# Altium PCB DE-180824.PcbDoc (part 1 of 2)
Units mil, origin at the board's own origin, x right, y up, seen from the top; angles counter-clockwise.
Board outline 4852.2 x 3356.49 mil, 3 copper layers (Top Layer, Mid-Layer 2, Bottom Layer); 131 components, 108 nets, 473 pads, 80 vias.
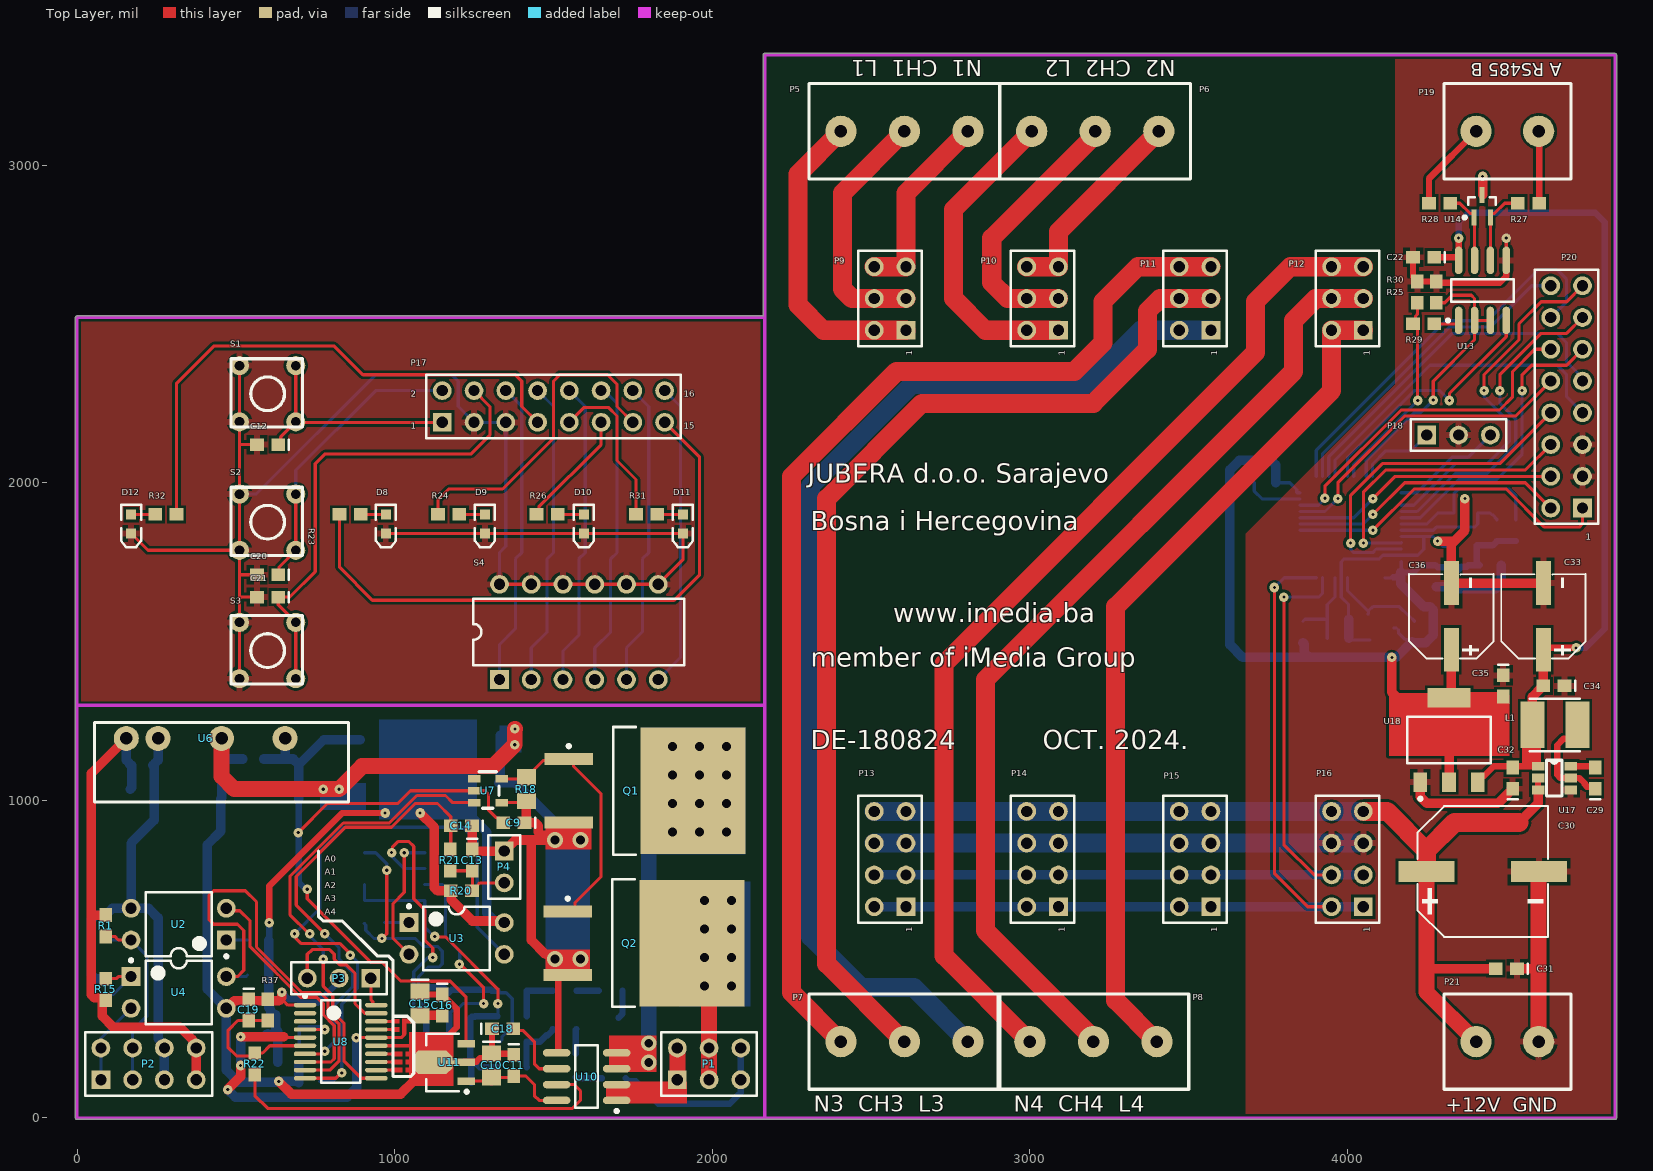
[diagram p0: Top Layer view]
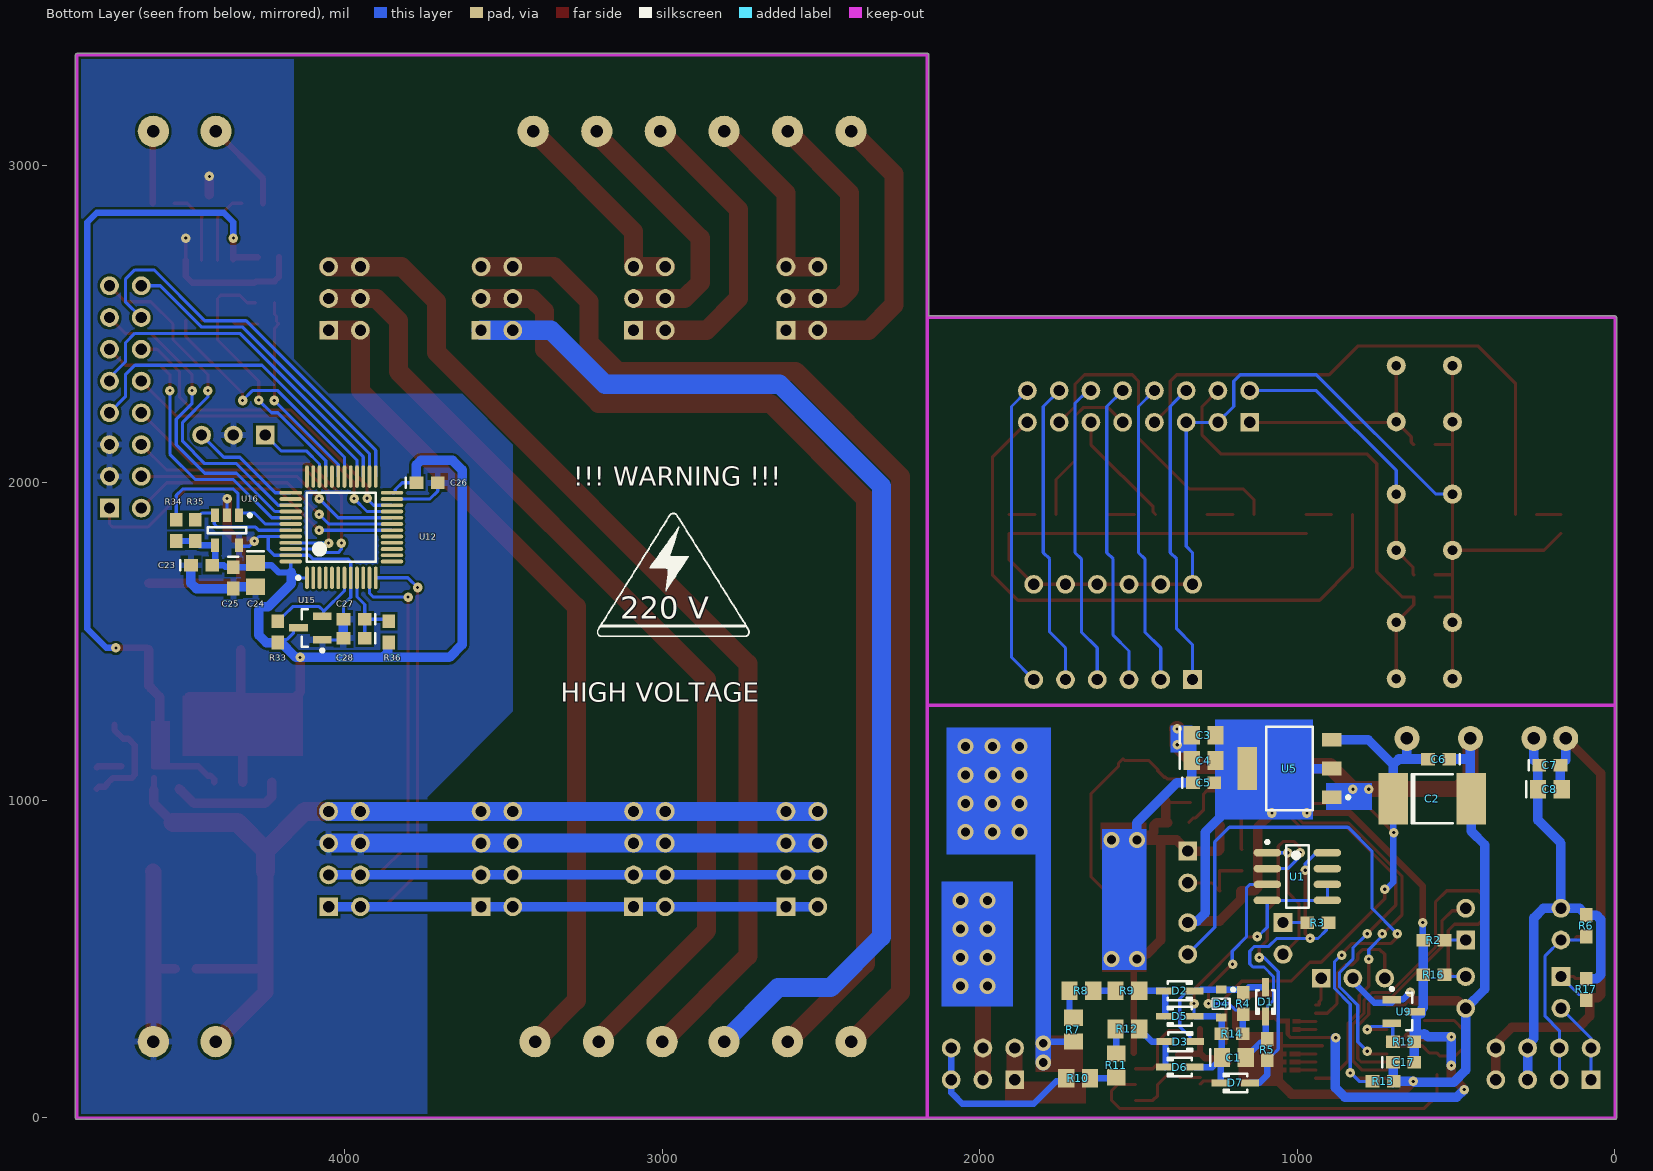
[diagram p1: Bottom Layer view, seen from below]
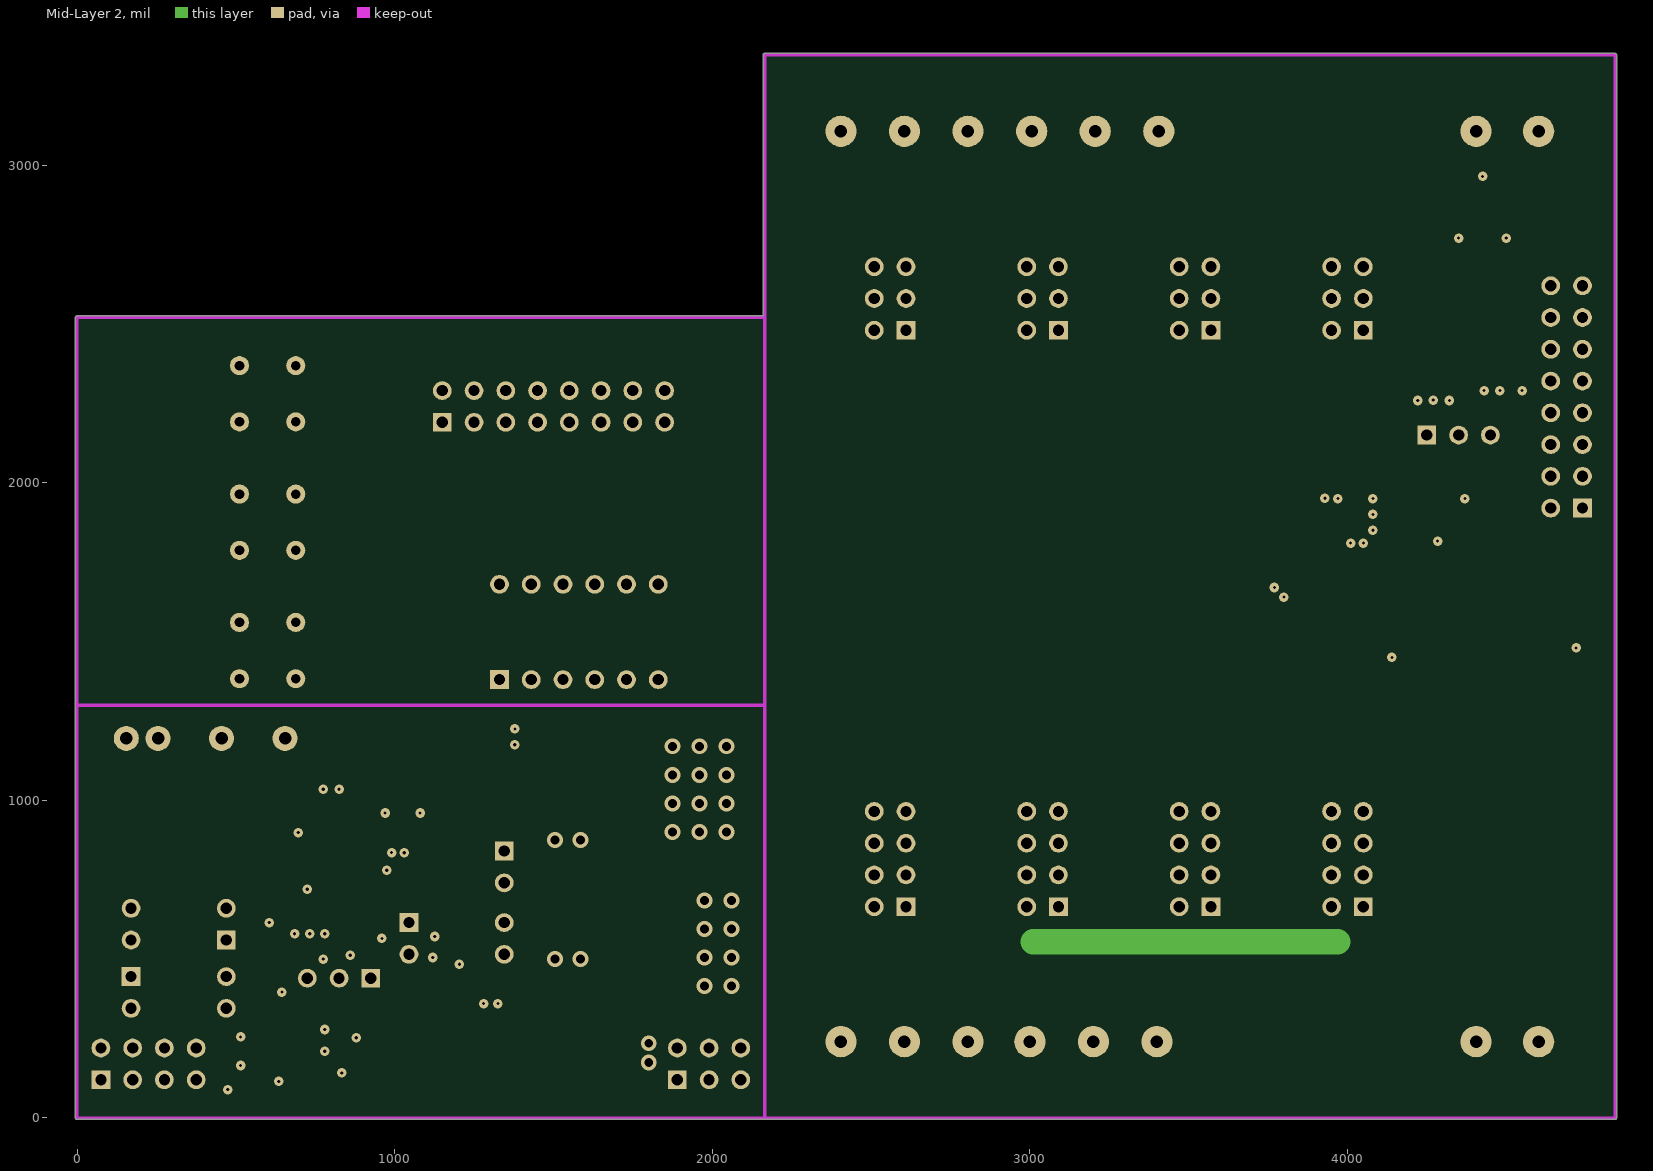
[diagram p2: Mid-Layer 2]

## Layer stack, top to bottom
Top Solder: solder mask 0.4, Solder Resist, Dk 3.5
Top Layer: signal copper 1.4
Dielectric 1: dielectric 12.6, FR-4, Dk 4.8
Mid-Layer 2: signal copper 1.4
Dielectric2: dielectric 12.6, FR-4, Dk 4.8
Bottom Layer: signal copper 1.4
Bottom Solder: solder mask 0.4, Solder Resist, Dk 3.5

## Board outline
-5.01,0 -5.01,2520 cw(c0,2520) 0,2525.01 2159.99,2525.01 2159.99,3346.46 cw(c2165,3346.46) 2165,3351.47 4842.17,3351.47 cw(c4842.17,3346.46) 4847.18,3346.46 4847.18,0 cw(c4842.17,0) 4842.17,-5.01 0,-5.01 cw(c0,0)

## Design rules (kind name [scope] priority, off if disabled: settings)
BoardOutlineClearance [All] p1: gap=11.81 ignorepadtopadclearanceinfootprint=FALSE except(15.75: Arc-SplitBarrior Arc-SplitContinuation Track-SplitBarrior Track-SplitContinuation SMDPad-SplitBarrior SMDPad-SplitContinuation THPad-SplitBarrior THPad-SplitContinuation Via-SplitBarrior Via-SplitContinuation Fill-SplitBarrior Fill-SplitContinuation Poly-SplitBarrior Poly-SplitContinuation Region-SplitBarrior Region-SplitContinuation Text-SplitBarrior Text-SplitContinuation)
Clearance "Clearance Different Nets" [All] p1: gap=7.87 ignorepadtopadclearanceinfootprint=FALSE except(3.5: Arc-Arc Arc-Track Arc-SMDPad Track-Track Track-SMDPad; 5: SMDPad-SMDPad SMDPad-Via THPad-Via Via-Via; 10: Arc-Via Arc-Text Track-Via Track-Text SMDPad-Text THPad-Text Via-Text Fill-Text Poly-Text Region-Text Text-Text; 19.68: THPad-THPad Via-Hole)
Clearance "Clearance Same Nets" [All] p2: gap=7.87 ignorepadtopadclearanceinfootprint=FALSE except(3.5: Arc-Arc Arc-Track Arc-SMDPad Track-Track Track-SMDPad SMDPad-SMDPad; 5: SMDPad-Via THPad-Via; 10: Arc-Via Arc-Text Track-Via Track-Text SMDPad-Text THPad-Text Via-Via Via-Text Fill-Text Poly-Text Region-Text Text-Text)
Clearance "Clearance Bottom Layer" [OnLayer('Bottom Layer')] p3: gap=8 ignorepadtopadclearanceinfootprint=TRUE except(10: Arc-Text Track-Text SMDPad-Text THPad-Text Via-Text Fill-Text Poly-Text Region-Text Text-Text)
Clearance "Clearance Top Layer" [OnLayer('Top Layer')] p4: gap=8 ignorepadtopadclearanceinfootprint=TRUE except(10: Arc-Text Track-Text SMDPad-Text THPad-Text Via-Text Fill-Text Poly-Text Region-Text Text-Text)
HoleSize [All] p1: absolutevalues=TRUE maxlimit=248.03 minlimit=7.87 maxpercent=80.000 minpercent=20.000
MinimumAnnularRing [All] p1: minimumring=5.12
MinimumSolderMaskSliver [All] p1: minsoldermaskwidth=3.94
PolygonConnect PolygonConnect_1 [All] p1: thpad.connectstyle=Relief thpad.reliefconductorwidth=20 thpad.reliefentries=4 thpad.polygonreliefangle="90 Angle" thpad.airgapwidth=10 smdpad.connectstyle=Relief smdpad.reliefconductorwidth=20 smdpad.reliefentries=4 smdpad.polygonreliefangle="90 Angle" smdpad.airgapwidth=10 via.connectstyle=Direct via.reliefconductorwidth=20 via.reliefentries=4 via.polygonreliefangle="90 Angle" via.airgapwidth=10
RoutingCorners [All] p1: cornerstyle=Round minsetback=100 maxsetback=100
RoutingVias [All] p1: holewidth=19.68 width=39.37 viastyle="Through Hole" minholewidth=7.87 minwidth=13.78 maxholewidth=39.37 maxwidth=78.74
SilkToSilkClearance [All] p1: silktosilkclearance=3.94
SilkToSolderMaskClearance [IsPad] p1: minsilkscreentomaskgap=3.94 clearancetoexposedcopper=TRUE
SolderMaskExpansion [All] p1: expansion=4 istentingtop=FALSE
SupplyNets "Schematic Supply Nets_10" [InNet('GND1')] p1: voltage=0.000
SupplyNets "Schematic Supply Nets_9" [InNet('3V3')] p2: voltage=0.000
SupplyNets "Schematic Supply Nets_8" [InNet('L1')] p3: voltage=0.000
SupplyNets "Schematic Supply Nets_7" [InNet('+12_1')] p4: voltage=0.000
SupplyNets "Schematic Supply Nets_6" [InNet('GND')] p5: voltage=0.000
SupplyNets "Schematic Supply Nets_5" [InNet('L1IN')] p6: voltage=0.000
SupplyNets "Schematic Supply Nets_4" [InNet('GND2')] p7: voltage=0.000
SupplyNets "Schematic Supply Nets_3" [InNet('5V')] p8: voltage=0.000
SupplyNets "Schematic Supply Nets_2" [InNet('+3V3_1')] p9: voltage=0.000
SupplyNets "Schematic Supply Nets_1" [InNet('+12V')] p10: voltage=0.000
SupplyNets "Schematic Supply Nets" [InNet('12V')] p11: voltage=0.000
Width [All] p1: maxlimit=100 minlimit=3.5 preferedwidth=15
25 further rules are at their usual default settings.

## Classes and differential pairs
component class DE-180824_1: C12 C20 C21 C22 C23 C24 C25 C26 C27 C28 C29 C30 C31 C32 C33 C34 C35 C36 D8 D9 D10 D11 D12 L1 P5 P6 P7 P8 P9 P10 P11 P12 P13 P14 P15 P16 P17 P18 P19 P20 P21 R23 R24 R25 R26 R27 R28 R29 R30 R31 R32 R33 R34 R35 R36 S1 S2 S3 S4 U12 U13 U14 U15 U16 U17 U18
component class DE-180824: C1 C2 C3 C4 C5 C6 C7 C8 C9 C10 C11 C13 C14 C15 C16 C17 C18 C19 D1 D2 D3 D4 D5 D6 D7 P1 P2 P3 P4 Q1 Q2 R1 R2 R3 R4 R5 R6 R7 R8 R9 R10 R11 R12 R13 R14 R15 R16 R17 R18 R19 R20 R21 R22 R37 U1 U2 U3 U4 U5 U6 U7 U8 U9 U10 U11

## Components (designator, comment, footprint, x,y, rotation, side; value= is the part's Value field where it differs from the comment)
C1 "" 0805 1200,190 r180 bottom value=10uF
C2 "47uF" H 575,1005 r180 bottom
C3 "C0805" 0805 1295,1205 r180 bottom value=10uF
C4 "C0805" 0805 1295,1125 r180 bottom value=10uF
C5 "C0603" 0603 1295,1055 r180 bottom value=100nF
C6 "C0603" 0603 555,1130 r0 bottom value=100nF
C7 "C0603" 0603 205,1110 r180 bottom value=100nF
C8 "C0805" 0805 205,1035 r180 bottom value=10uF
C9 "C0603" 0603 1375,930 r180 top value=100nF
C10 "" 0805 1305,165 r270 top value=4u7
C11 "" 0603 1375,165 r270 top value=100nF
C12 "C0603" 0603 600,2120 r180 top value=100nF
C13 "C0603" 0603 1245,811.54 r270 top value=100nF
C14 "C0603" 0603 1210,920 r180 top value=100nF
C15 "C0805" 0805 1080,360 r270 top value=10uF
C16 "C0603" 0603 1150,355 r270 top value=100nF
C17 "C0603" 0603 665,175 r180 bottom value=100nF
C18 "" 0603 1340,280 r0 top value=10nF
C19 "" 0603 540,340 r270 top value=100nF
C20 "C0603" 0603 600,1710 r180 top value=100nF
C21 "C0603" 0603 600,1640 r180 top value=100nF
C22 "100nF" 0603 4240,2710 r180 top
C23 "" 0603 4450,1740 r180 bottom value=100nF
C24 "4u7" 0805 4280,1710 r270 bottom
C25 "100nF" 0603 4350,1700 r270 bottom
C26 "100nF" 0603 3740,2000 r180 bottom
C27 "1uF" 0603 3970,1570 r0 bottom
C28 "10nF" 0603 3970,1510 r0 bottom
C29 "" 0603 4780,1070 r90 top value=100nF
C30 "470uF" "ROQANG VT1V471M1010" 4440,770 r0 top value=10uF
C31 "" 0603 4500,470 r180 top value=100nF
C32 "" 0603 4520,1070 r90 top value=100nF
C33 "470uF" "SMD,D6.3xL7.7mm Aluminum Electrolytic Capacitors" 4620,1590 r90 top
C34 "" 0603 4650,1360 r180 top value=100nF
C35 "" 0603 4490,1360 r270 top value=100nF
C36 "" "SMD,D6.3xL7.7mm Aluminum Electrolytic Capacitors" 4330,1590 r90 top value=220uF
D1 "1N4148" SOD323 1100,365 r270 bottom
D2 "1N4148" SOD323 1370,400 r180 bottom
D3 "1N4148" SOD323 1368.74,240 r180 bottom
D4 "Z12V" ONSC-SOD-323-2-477-02_V 1240,360 r270 bottom
D5 "1N4148" SOD323 1370,320 r0 bottom
D6 "1N4148" SOD323 1370,160 r0 bottom
D7 "1N4148" SOD323 1195,110 r0 bottom
D8 "CH 1" 1.6X0.8X0.8 972.13,1870 r270 top
D9 "CH 2" 1.6X0.8X0.8 1283.91,1870 r270 top
D10 "CH 3" 1.6X0.8X0.8 1595.7,1870 r270 top
D11 "CH 4" 1.6X0.8X0.8 1907.49,1870 r270 top
D12 "LEARN" 1.6X0.8X0.8 170,1870 r270 top
L1 "" XRNR4030-4.7uH/M 4650,1240 r0 top value=4,7uH
P1 "Header 3X2" HDR2X3 1890,120 r0 top
P2 "CTRL" HDR2X4 75,120 r0 top
P3 "Header 3" HDR1X3 925,440 r180 top
P4 "Header 2" HDR1X2 1345,840 r270 top
P5 "DIMMER1" "TERMINAL BLOK 3" 2605,3106.5 r90 top locked
P6 "DIMMER2" "TERMINAL BLOK 3" 3205.86,3106.5 r90 top locked
P7 "DIMMER3" "TERMINAL BLOK 3" 2605,240 r270 top locked
P8 "DIMMER4" "TERMINAL BLOK 3" 3200,240 r270 top locked
P9 "Header 3X2" HDR2X3 2610,2480 r90 top locked
P10 "Header 3X2" HDR2X3 3090,2480 r90 top locked
P11 "Header 3X2" HDR2X3 3570,2480 r90 top locked
P12 "Header 3X2" HDR2X3 4050,2480 r90 top locked
P13 "Header 4X2" HDR2X4 2610,665 r90 top locked
P14 "Header 4X2" HDR2X4 3090,665 r90 top locked
P15 "Header 4X2" HDR2X4 3570,665 r90 top locked
P16 "Header 4X2" HDR2X4 4050,665 r90 top locked
P17 "Header 8X2" HDR2X8 1150,2190 r0 top
P18 "ULINK ICSP" HDR1X3 4250,2150 r0 top
P19 "RS485" "TERMINAL BLOK 2" 4503.5,3106.5 r270 top
P20 "Header 8X2" HDR2X8 4740,1920 r90 top
P21 "POWER" "TERMINAL BLOK 2" 4503.5,240 r90 top locked
Q1 "16N65" INF-PG-TO263-3-2_N 1788.43,1030 r0 top
Q2 "16N65" INF-PG-TO263-3-2_N 1785.16,550 r0 top
R1 "" ERA-0603 90,605 r270 top value=2K2
R2 "10K" ERA-0603 570,560 r0 bottom value=330R
R3 "" ERA-0603 935,615 r180 bottom value=1K
R4 "3K9" ERA-0603 1170,360 r90 bottom
R5 "" ERA-0603 1095,215 r90 bottom value=39K
R6 "" ERA-0603 90,605 r90 bottom value=820R
R7 "" ERA-0805 1705,277.6 r90 bottom value=18K
R8 "" ERA-0805 1680,400 r180 bottom value=18K
R9 "" ERA-0805 1535,400 r180 bottom value=18K
R10 "" ERA-0805 1690,125 r180 bottom value=18K
R11 "" ERA-0805 1570,165 r90 bottom value=18K
R12 "" ERA-0805 1535,280 r180 bottom value=18K
R13 "" ERA-0603 730,115 r0 bottom value=2K2
R14 "39K" ERA-0603 1205,265 r180 bottom
R15 "" ERA-0603 90,405 r90 top value=1K2
R16 "10K" ERA-0603 570,450 r0 bottom value=1K
R17 "" ERA-0603 90,405 r90 bottom value=470R
R18 "100K" ERA-0805 1415,1035 r90 top
R19 "10K" ERA-0603 665,240 r180 bottom
R20 "10K" ERA-0603 1210,715 r180 top
R21 "1K" ERA-0603 1175,811.54 r270 top
R22 "" ERA-0603 560,170 r270 top value=1K
R23 "2K2" ERA-0603 860,1900 r0 top
R24 "2K2" ERA-0603 1170,1900 r0 top
R25 "10K" ERA-0603 4280,2600 r270 top
R26 "2K2" ERA-0603 1480,1900 r0 top
R27 "10R" ERA-0603 4570,2880 r180 top
R28 "10R" ERA-0603 4290,2880 r0 top
R29 "1K2" ERA-0603 4240,2500 r0 top
R30 "2K2" ERA-0603 4220,2600 r90 top
R31 "2K2" ERA-0603 1793.46,1900 r0 top
R32 "2K2" ERA-0603 280,1900 r180 top
R33 "10K" ERA-0603 4210,1530 r270 bottom
R34 "2K2" ERA-0603 4530,1850 r270 bottom
R35 "2K2" ERA-0603 4470,1850 r270 bottom
R36 "10R" ERA-0603 3860,1530 r270 bottom
R37 "" ERA-0603 600,340 r90 top value=2K
S1 "UP" TACTILE_SWITCH 600,2280 r180 top
S2 "<OK >" TACTILE_SWITCH 600,1875.71 r180 top
S3 "DOWN" TACTILE_SWITCH 600,1471.42 r180 top
S4 "SW DIP-6" DIP-12/SW 1580,1530 r0 top
U1 "LM393MX" M08A_N 1000,760 r180 bottom
U2 "PC817 DIP4" DIP-4 320,610 r180 top
U3 "PC817 DIP4" DIP-4 1195,565 r0 top
U4 "PC817 DIP4" DIP-4 320,395 r0 top
U5 "REG1117-3.3" ZZ311 1025,1100 r90 bottom
U6 "IF1212S-1W" IF1212S-1W 155,1195 r0 top
U7 "COS1415" SOT23-5 1356.3,1095 r180 top
U8 "STM32F030F4P6" STM-TSSOP20_N 830,240 r0 top
U9 "TLV803MDBZR" DBZ3_N 665,335 r180 bottom
U10 "MCS1802GS-10-Z" SOIC-SN8_N 1604.49,130 r180 top
U11 "L78L05ACUTR" SOT-89_N 1150,175 r180 top
U12 "STM32F030C8T6" STM-LQFP48_N 4010,1860 r90 bottom
U13 "SN75176BD" D008_N 4425,2605.51 r90 top
U14 "ESDS552" DCK3_N 4424.18,2870.53 r90 top
U15 "TLV803MDBZR" DBZ3_N 4107.4,1542.6 r0 bottom
U16 "24AA01T-I/OT" SOT-23-OT5_N 4370,1850 r270 bottom
U17 "AP63205" TSOT-26 4600,1107.4 r0 top
U18 "REG1117-3.3" ZZ311 4320,1190 r0 top

## Footprints (in the part's own frame and the unit in brackets; to place one, negate y for a bottom-side part, rotate by r counter-clockwise, add the part's x,y. Pads: shape width x height; smd on the part's side, far side on the other; paste and mask are expansions set on the pad)
1.6X0.8X0.8 [mm] "SM LED; 2 Flat Leads"
  rect 0.8x0.8 smd: 1(-0.75,0) 2(0.75,0)
  silkscreen extent -1.55,-0.8 1.85,0.8
0603 [mm] "Chip Capacitor; Body 1.6 x 0.8 mm (LxW typ)"
  rect 1.1x1 smd: 1(-0.85,0) 2(0.85,0)
  silkscreen extent -1.7,-0.4 -1.7,0.4
0805 [mm] "Chip Capacitor; Body 2.0 x 1.2 mm (LxW typ)"
  rect 1.3x1.5 smd: 1(-0.95,0) 2(0.95,0)
  silkscreen extent -1.9,-0.65 -1.9,0.65
D008_N [mm] "SOIC, 8-Leads, Body 4.9x3.9mm, Pitch 1.27mm, IPC Medium Density"
  oval 2.2x0.6 smd: 1(-2.4,1.905) 2(-2.4,0.635) 3(-2.4,-0.635) 4(-2.4,-1.905) 5(2.4,-1.905) 6(2.4,-0.635) 7(2.4,0.635) 8(2.4,1.905)
  silkscreen extent -2.52,-2.5 0.9,2.88, body extent -1.95,-2.45 1.95,2.45, height 1.75
DBZ3_N [mm] "SOT23, 3-Leads, Body 2.9x1.3mm, Pitch 0.95mm, Lead Span 2.4mm, IPC Medium Density"
  rect 1.5x0.6 smd: 1(-0.95,0.95) 2(-0.95,-0.95) 3(0.95,0)
  silkscreen extent -1.07,-1.5 0.7,1.92, body extent -0.7,-1.52 0.7,1.52, height 1.12
DCK3_N [mm] "SOT23, 3-Leads, Body 2.0x1.25mm, Pitch 0.65mm, Lead Span 2.1mm, IPC Medium Density"
  rect 1.3x0.4 smd: 1(-0.9,0.65) 2(-0.9,-0.65) 3(0.9,0)
  silkscreen extent -1.02,-1.1 0.7,1.52, body extent -0.7,-1.07 0.7,1.08, height 1.1
DIP-4 [mm] "DIP; 4 Leads; Row Spacing 7.62 mm; Pitch 2.54 mm"
  rect 1.5x1.5 hole 0.9: 1(-3.81,1.27)
  round 1.5 hole 0.9: 2(-3.81,-1.27) 3(3.81,-1.27) 4(3.81,1.27)
  silkscreen extent -3.94,-2.55 2.65,2.69, body extent -3.15,-2.5 3.15,2.5, height 5.6
DIP-12/SW [mm] "DIP Switch; 12 Leads"
  rect 1.5x1.5 hole 0.9: 1(-6.35,-3.81)
  round 1.5 hole 0.9: 2(-3.81,-3.81) 3(-1.27,-3.81) 4(1.27,-3.81) 5(3.81,-3.81) 6(6.35,-3.81) 7(6.35,3.81) 8(3.81,3.81) 9(1.27,3.81) 10(-1.27,3.81) 11(-3.81,3.81) 12(-6.35,3.81)
  silkscreen extent -8.43,-2.65 8.41,2.65
ERA-0603 [mm] "Chip Resistor; Body 1.6 x 0.8 mm (LxW typ)"
  rect 1.1x1 smd: 1(-0.85,0) 2(0.85,0)
ERA-0805 [mm] "Chip Resistor; Body 2 x 1.3 mm (LxW typ)"
  rect 1.3x1.5 smd: 1(-0.95,0) 2(0.95,0)
H [mm] "Chip Capacitor; Body 7.24 x 3.81 mm (LxW typ)"
  rect 2.35x4.1 smd: 1(-3.125,0) 2(3.125,0)
  silkscreen extent -1.65,-1.95 1.65,1.95
HDR1X2 [mm] "Connector; Header; 2 Position"
  rect 1.5x1.5 hole 0.9: 1(0,0)
  round 1.5 hole 0.9: 2(2.54,0)
  silkscreen extent -1.27,-1.27 3.81,1.27
HDR1X3 [mm] "Connector; Header; 3 Position"
  rect 1.5x1.5 hole 0.9: 1(0,0)
  round 1.5 hole 0.9: 2(2.54,0) 3(5.08,0)
  silkscreen extent -1.27,-1.27 6.35,1.27
HDR2X3 [mm] "Connector; Header; 3x2 Position"
  rect 1.5x1.5 hole 0.9: 1(0,0)
  round 1.5 hole 0.9: 2(0,2.54) 3(2.54,0) 4(2.54,2.54) 5(5.08,0) 6(5.08,2.54)
  silkscreen extent -1.27,-1.27 6.35,3.81
HDR2X4 [mm] "Connector; Header; 4x2 Position"
  rect 1.5x1.5 hole 0.9: 1(0,0)
  round 1.5 hole 0.9: 2(0,2.54) 3(2.54,0) 4(2.54,2.54) 5(5.08,0) 6(5.08,2.54) 7(7.62,0) 8(7.62,2.54)
  silkscreen extent -1.27,-1.27 8.89,3.81
HDR2X8 [mm] "Connector; Header; 8x2 Position"
  rect 1.5x1.5 hole 0.9: 1(0,0)
  round 1.5 hole 0.9: 2(0,2.54) 3(2.54,0) 4(2.54,2.54) 5(5.08,0) 6(5.08,2.54) 7(7.62,0) 8(7.62,2.54) 9(10.16,0) 10(10.16,2.54) 11(12.7,0) 12(12.7,2.54) 13(15.24,0) 14(15.24,2.54) 15(17.78,0) 16(17.78,2.54)
  silkscreen extent -1.27,-1.27 19.05,3.81
IF1212S-1W [mm] "Isolated DC/DC converter"
  round 2 hole 1: 1(0,0) 2(2.54,0) 4(7.62,0) 6(12.7,0)
  silkscreen extent -2.54,-5.08 17.78,1.27, body extent -2.54,-5.08 17.78,1.27, height 10
INF-PG-TO263-3-2_N [mm] "DPAK, 3-Leads, Body 10x9.25mm, Pitch 2.54mm, IPC Medium Density"
  rect 3.85x0.95 smd: 1(-6.1,2.54) 3(-6.1,-2.54)
  rect 8.4x10.1 smd: 2(3.85,0)
  silkscreen extent -6.22,-5.1 -0.75,5.1, body extent -2.55,-5.1 6.9,5.1, height 4.4
M08A_N [mm] "SOIC, 8-Leads, Body 4.9x3.9mm, Pitch 1.27mm, IPC Medium Density"
  oval 2.2x0.6 smd: 1(-2.4,1.905) 2(-2.4,0.635) 3(-2.4,-0.635) 4(-2.4,-1.905) 5(2.4,-1.905) 6(2.4,-0.635) 7(2.4,0.635) 8(2.4,1.905)
  silkscreen extent -2.53,-2.5 0.9,2.88, body extent -2,-2.5 2,2.5, height 1.75
ONSC-SOD-323-2-477-02_V [mm] "SOD, 2-Leads, Body 1.7x1.25mm"
  rect 0.63x0.83 smd: 1(-1.115,0) 2(1.115,0)
  silkscreen extent -1.24,-0.67 0.4,1.09, body extent -0.85,-0.63 0.85,0.63, height 1.06
"ROQANG VT1V471M1010" [mm] "470uF 35V 286mA@120Hz ±20% SMD,D10xL10.2mm Aluminum Electrolytic Capacitors - SMD ROHS"
  rect 4.5x1.65 smd: 1(-4.862,0.146) 2(4.138,0.146)
  silkscreen extent -5.59,-5.08 4.86,5.37, body extent -5,-5 5,5, height 10.2
"SMD,D6.3xL7.7mm Aluminum Electrolytic Capacitors" [mm]
  rect 3.5x1.2 smd paste+0 mask+0.051: 1(-2.949,0.074) 2(2.391,0.074)
  silkscreen extent -3.66,-3.3 3.1,3.45, body extent -3.4,-3.15 2.9,3.15, height 7.7
SOD323 [mm] "SOD-323/SC-76; 2 Leads; Body 1.7 x 1.3 mm, (LxW)"
  rect 1.45x0.55 smd: 1(1.175,0) 2(-1.175,0)
  silkscreen extent -0.95,-0.75 0.95,0.75
SOIC-SN8_N [mm] "SOIC, 8-Leads, Body 4.9x3.8mm, Pitch 1.27mm, IPC Medium Density"
  oval 2.2x0.6 smd: 1(-2.4,1.905) 2(-2.4,0.635) 3(-2.4,-0.635) 4(-2.4,-1.905) 5(2.4,-1.905) 6(2.4,-0.635) 7(2.4,0.635) 8(2.4,1.905)
  silkscreen extent -2.53,-2.5 0.9,2.88, body extent -2,-2.5 2,2.5, height 1.75
SOT23-5 [mm] "SMD small outline"
  rect 1x0.6 smd paste+0 mask+0.05: 1(2.7,0.701) 2(2.7,1.651) 3(2.7,2.601) 4(0.5,2.601) 5(0.5,0.701)
  silkscreen extent 0.71,0.13 2.3,3.05
SOT-23-OT5_N [mm] "SOT23, 5-Leads, Body 2.9x1.6mm, Pitch 0.95mm, Lead Span 2.7mm, IPC Medium Density"
  rect 1.1x0.65 smd: 1(-1.2,0.95) 2(-1.2,0) 3(-1.2,-0.95) 4(1.2,-0.95) 5(1.2,0.95)
  silkscreen extent -1.32,-1.55 0.25,1.95, body extent -0.9,-1.55 0.9,1.55, height 1.45
SOT-89_N [mm] "SOT89, 3-Leads, Body 4.5x2.4 mm, Pitch 1.5mm, Lead Span 4.1mm, IPC Medium Density"
  rect 1.4x0.6 smd: 1(-1.9,1.5) 3(-1.9,-1.5)
  rect 1.8x0.6 smd: 2(-1.7,0)
  oct 3.2x1.9 smd: 2(0.8,0)
  silkscreen extent -2.08,-2.3 1.3,2.47, body extent -1.3,-2.3 1.3,2.3, height 1.6
STM-LQFP48_N [mm] "QFP, 48-Leads, Body 7x7mm, Pitch 0.5mm, IPC Medium Density"
  oval 1.8x0.3 smd: 1(-4.05,2.75) 2(-4.05,2.25) 3(-4.05,1.75) 4(-4.05,1.25) 5(-4.05,0.75) 6(-4.05,0.25) 7(-4.05,-0.25) 8(-4.05,-0.75) 9(-4.05,-1.25) 10(-4.05,-1.75) 11(-4.05,-2.25) 12(-4.05,-2.75) 25(4.05,-2.75) 26(4.05,-2.25) 27(4.05,-1.75) 28(4.05,-1.25) 29(4.05,-0.75) 30(4.05,-0.25) 31(4.05,0.25) 32(4.05,0.75) 33(4.05,1.25) 34(4.05,1.75) 35(4.05,2.25) 36(4.05,2.75)
  oval 0.3x1.8 smd: 13(-2.75,-4.05) 14(-2.25,-4.05) 15(-1.75,-4.05) 16(-1.25,-4.05) 17(-0.75,-4.05) 18(-0.25,-4.05) 19(0.25,-4.05) 20(0.75,-4.05) 21(1.25,-4.05) 22(1.75,-4.05) 23(2.25,-4.05) 24(2.75,-4.05) 37(2.75,4.05) 38(2.25,4.05) 39(1.75,4.05) 40(1.25,4.05) 41(0.75,4.05) 42(0.25,4.05) 43(-0.25,4.05) 44(-0.75,4.05) 45(-1.25,4.05) 46(-1.75,4.05) 47(-2.25,4.05) 48(-2.75,4.05)
  silkscreen extent -4.17,-2.75 2.75,3.58, body extent -3.5,-3.5 3.5,3.5, height 1.6
STM-TSSOP20_N [mm] "SOP, 20-Leads, Body 6.6x4.5mm, Pitch 0.65mm, IPC Medium Density"
  oval 1.8x0.35 smd: 1(-2.85,2.925) 2(-2.85,2.275) 3(-2.85,1.625) 4(-2.85,0.975) 5(-2.85,0.325) 6(-2.85,-0.325) 7(-2.85,-0.975) 8(-2.85,-1.625) 9(-2.85,-2.275) 10(-2.85,-2.925) 11(2.85,-2.925) 12(2.85,-2.275) 13(2.85,-1.625) 14(2.85,-0.975) 15(2.85,-0.325) 16(2.85,0.325) 17(2.85,0.975) 18(2.85,1.625) 19(2.85,2.275) 20(2.85,2.925)
  silkscreen extent -2.97,-3.3 1.55,3.77, body extent -2.25,-3.3 2.25,3.3, height 1.2
TACTILE_SWITCH [mil] "PCB push button"
  round 60 hole 30: 1(-88.58,88.58) 2(88.58,88.58) 3(88.58,-88.58) 4(-88.58,-88.58)
  silkscreen extent -110,-110 115,105
"TERMINAL BLOK 2" [mm] "Terminal blok 3,5mm"
  round 2.5 hole 1: 1(0,-2.5) 2(0,2.5)
  silkscreen extent -3.81,-5.08 3.81,5.08
"TERMINAL BLOK 3" [mm] "Terminal blok konektor 3 pina"
  round 2.5 hole 1: 1(0,5.08) 2(0,0) 3(0,-5.08)
  silkscreen extent -3.81,-7.62 3.81,7.62
TSOT-26 [mm]
  rect 1x0.7 smd: 1(0,0) 2(0,-0.95) 3(0,-1.9) 4(2.6,-1.9) 5(2.6,-0.95) 6(2.6,0)
  silkscreen extent 0.69,-2.38 1.91,0.48, body extent 0.53,-2.51 2.03,0.61, height 1
XRNR4030-4.7uH/M [mm] "2A 4.7uH Magnetic Adhesive Inductor ±20% 2.9A SMD-2P,4x4mm Power Inductors ROHS"
  rect 1.9x3.7 smd paste+0 mask+0.051: 1(-1.717,-0.059) 2(1.883,-0.059)
  silkscreen extent -1.92,-2.16 2.08,2.04
ZZ311 [mm] "SOT-223/SC-73; 4 Leads; Body 6.7 x 7.3 mm, inc. leads (LxW max)"
  rect 1.1x1.55 smd: 1(-2.3,-3.375) 2(0,-3.375) 3(2.3,-3.375)
  rect 3.45x1.55 smd: 4(0,3.375)
  silkscreen extent -3.35,-4.82 3.35,1.85

## Part data
C1 C10 C24: library part C0805, "Ceramic Chip Capacitor - Standard", PackageDocument=Mar-2001, Code_IPC=2012[0805], Code_JEITA=0805, ComponentLink1Description="Manufacturer Link", ComponentLink1URL=http://www.kemet.com/, ComponentLink2Description=Datasheet, ComponentLink2URL=http://www.kemet.com/kemet/web/homepage/kechome.nsf/vapubfilesname/F3102TA.pdf/$file/F3102TA.pdf, DatasheetDocument=Mar-2001, LatestRevisionDate=19-Mar-2004, LatestRevisionNote="Silkscreen size reduced.", Note="Footprint corresponds to dimensions for bulk cassette packaging. This case size has tightened tolerances.", PackageReference=0805, Published=17-Jul-2002, Publisher="Altium Limited"
C2: library part 194D476X0015H2, "Midget Conformal Coated Solid Tantalum Chip Capacitor: 47uF, 20% Tolerance, 15 WVDC @ +85°C, Surge = 20V", ComponentLink1Description="Manufacturer Link", ComponentLink1URL=http://www.vishay.com/, ComponentLink2Description=Datasheet, ComponentLink2URL=http://www.vishay.com/docs/40000/194d.pdf, DatasheetDocument=05-Jul-2002, Note="See Data Sheet for full range of components", PackageReference=H, Published=19-Mar-2004, Publisher="Altium Limited"
C3 C4 C5 C6 C7 C8 C9 C12 C13 C14 C15 C16 C17 C20 C21: "Ceramic Chip Capacitor - Standard", PackageDocument=Mar-2001, ComponentLink1Description="Manufacturer Link", ComponentLink1URL=http://www.kemet.com/, ComponentLink2Description=Datasheet, ComponentLink2URL=http://www.kemet.com/kemet/web/homepage/kechome.nsf/vapubfilesname/F3102TA.pdf/$file/F3102TA.pdf, DatasheetDocument=Mar-2001, LatestRevisionDate=19-Mar-2004, LatestRevisionNote="Silkscreen size reduced.", Note="Footprint corresponds to dimensions for bulk cassette packaging. This case size has tightened tolerances.", Published=17-Jul-2002, Publisher="Altium Limited"
  C3 C4 C8 C15: Code_IPC=2012[0805], Code_JEITA=0805, PackageReference=0805
  C5 C6 C7 C9 C12 C13 C14 C16 C17 C20 C21: Code_IPC="1608 [0603]", Code_JEITA=0603, PackageReference=0603
C11 C18 C19 C22 C23 C25 C26 C27 C28 C31 C35: library part C0603, "Ceramic Chip Capacitor - Standard", PackageDocument=Mar-2001, Code_IPC="1608 [0603]", Code_JEITA=0603, ComponentLink1Description="Manufacturer Link", ComponentLink1URL=http://www.kemet.com/, ComponentLink2Description=Datasheet, ComponentLink2URL=http://www.kemet.com/kemet/web/homepage/kechome.nsf/vapubfilesname/F3102TA.pdf/$file/F3102TA.pdf, DatasheetDocument=Mar-2001, LatestRevisionDate=19-Mar-2004, LatestRevisionNote="Silkscreen size reduced.", Note="Footprint corresponds to dimensions for bulk cassette packaging. This case size has tightened tolerances.", PackageReference=0603, Published=17-Jul-2002, Publisher="Altium Limited"
C29 C32 C34: library part C0603, "Ceramic Chip Capacitor - 25V", PackageDocument=Mar-2001, Code_IPC="1608 [0603]", Code_JEITA=0603, ComponentLink1Description="Manufacturer Link", ComponentLink1URL=http://www.kemet.com/, ComponentLink2Description=Datasheet, ComponentLink2URL=http://www.kemet.com/kemet/web/homepage/kechome.nsf/vapubfilesname/F3102TA.pdf/$file/F3102TA.pdf, DatasheetDocument=Mar-2001, LatestRevisionDate=19-Mar-2004, LatestRevisionNote="Silkscreen size reduced.", Note="Footprint corresponds to dimensions for bulk cassette packaging. This case size has tightened tolerances.", PackageReference=0603, Published=17-Jul-2002, Publisher="Altium Limited"
C30 C33 C36: library part "ROQANG VT1C221M0607", "220uF 16V 110mA@120Hz ±20% SMD,D6.3xL7.7mm Aluminum Electrolytic Capacitors - SMD ROHS", ComponentLink1Description="Manufacturer Link", ComponentLink1URL=http://www.vishay.com/, ComponentLink2Description=Datasheet, ComponentLink2URL=http://www.vishay.com/docs/25014/eka.pdf, DatasheetDocument=20-Feb-2001, DrillSize="Nominal, Rounded To The Nearest 0.1mm", Note="Refer to Manufacturer's Data Sheets for other lead formations", PackageReference=CAPPR2-5X11, Published=19-Mar-2004, Publisher="Altium Limited"
D1 D2 D3 D5 D6 D7: library part 1PS76SB10, "Schottky Barrier Diode", ComponentLink1Description="Manufacturer Link", ComponentLink1URL=http://www.semiconductors.philips.com/, ComponentLink2Description=Datasheet, ComponentLink2URL=http://www.semiconductors.philips.com/acrobat/datasheets/1PS76SB10_2.pdf, DatasheetVersion=14-Oct-1996, LatestRevisionDate=19-Mar-2004, LatestRevisionNote="Silkscreen size reduced.", PackageDescription="SOD-323/SC-76; 2 Leads; Body 1.7 x 1.3 mm, (LxW)", PackageReference=SOD323, PackageVersion=May-1999, Published=17-Sep-2003, Publisher="Altium Limited"
D4: library part SZMM3Z12VT1G, "Zener Voltage Regulator, 300 mW, 2-Pin SOD-323, Pb-Free, Tape and Reel", Manufacturer="On Semiconductor", Supplier Part Number 1=SZMM3Z12VT1G-ND, ComponentLink1Description="Manufacturer URL", ComponentLink1URL=http://www.onsemi.com/, ComponentLink2Description=Datasheet, ComponentLink2URL=http://www.onsemi.cn/pub_link/Collateral/MM3Z2V4T1-D.PDF, ComponentLink3Description="Package Specification", ComponentLink3URL=http://www.onsemi.com/pub_link/Collateral/477-02.PDF.1, DatasheetVersion="Rev. 9", Mounting Technology="Surface Mount", P Max (W)=0.3, PackageDescription="2-Pin SOD, Body 1.7 x 1.25 mm", PackageReference=SOD-323-2-477-02, PackageVersion="Rev. H, 03/2007", Packing="Tape and Reel", PartNumber=SZMM3Z12VT1G, RoHS=Pb-Free, Supplier 1=Digi-Key, Supplier 2=Mouser, Supplier Part Number 2=863-SZMM3Z12VT1G, VZ Typ (V)=12
D8 D9 D10 D11 D12: library part HSMZ-C190, "High Performance Chip LED, Red", LED_Colour=Red, PackageDocument=11-Mar-2002, ComponentLink1Description="Manufacturer Link", ComponentLink1URL=http://www.agilent.com/, ComponentLink2Description=Datasheet, ComponentLink2URL=http://cp.literature.agilent.com/litweb/pdf/5988-5891EN.pdf, DatasheetDocument=11-Mar-2002, LuminousIntensity="40mcd (Minimum).", PackageReference=1.6X0.8X0.8, PCB_Layout="Complies with manufacturer's recommendation.", Published=11-Dec-2002, Publisher="Altium Limited"
L1: library part Inductor, "2A 4.7uH Magnetic Adhesive Inductor ±20% 2.9A SMD-2P,4x4mm Power Inductors ROHS"
P1 P9 P10 P11 P12: "Header, 3-Pin, Dual row", LatestRevisionDate=17-Jul-2002, LatestRevisionNote="Re-released for DXP Platform.", Publisher="Altium Limited"
P2: library part "Header 4X2", "Header, 4-Pin, Dual row", LatestRevisionDate=17-Jul-2002, LatestRevisionNote="Re-released for DXP Platform.", Publisher="Altium Limited"
P3: "Header, 3-Pin", LatestRevisionDate=17-Jul-2002, LatestRevisionNote="Re-released for DXP Platform.", Publisher="Altium Limited"
P4: "Header, 2-Pin", LatestRevisionDate=17-Jul-2002, LatestRevisionNote="Re-released for DXP Platform.", Publisher="Altium Limited"
P5 P6 P7 P8: library part "TERMINAL BLOK 3", "3 pinski terminal blok konektor"
P13 P14 P15 P16: "Header, 4-Pin, Dual row", LatestRevisionDate=17-Jul-2002, LatestRevisionNote="Re-released for DXP Platform.", Publisher="Altium Limited"
P17 P20: "Header, 8-Pin, Dual row", LatestRevisionDate=17-Jul-2002, LatestRevisionNote="Re-released for DXP Platform.", Publisher="Altium Limited"
P18: library part "Header 3", "Header, 3-Pin", LatestRevisionDate=17-Jul-2002, LatestRevisionNote="Re-released for DXP Platform.", Publisher="Altium Limited"
P19 P21: library part "TERMINAL BLOK 2", "Terminal blok konektor 3,5 mm"
Q1 Q2: library part "IPB020NE7N3 G", "N-Channel OptiMOS 3 Power-Transistor, 75 V VDS, 120 A ID, -55 to 175 degC, PG-TO263-3-2, Reel, Green", Manufacturer=Infineon, Supplier Part Number 1=726-IPB020NE7N3GXT, ComponentLink1Description="Manufacturer URL", ComponentLink1URL=http://www.infineon.com/, ComponentLink2Description=Datasheet, ComponentLink2URL=http://www.infineon.com/dgdl/IPB020NE7N3_Rev2.2.pdf?folderId=db3a304313b8b5a60113cee8763b02d7&fileId=db3a304320d39d590121e31c838554d3, ComponentLink3Description="Package Specification", ComponentLink3URL=http://www.infineon.com/dgdl/BTS141TC_DS_10.pdf?folderId=db3a3043163797a6011667aa084c0e01&fileId=db3a3043242ebc9e01242f43f58b003e&location=en.Products.Automotive_ICs.Smart_High-_and_Low-Side_Switches.HITFET___TEMPFET__-_Smart_Low-Side_Switches.DATASHEET.BTS141TC_DS_10.pdf, DatasheetVersion="Rev. 2.2", Green=TRUE, Halogen-free=TRUE, ID (max)="120 A", IDpuls (max)="480 A", Mounting Technology="Surface Mount", PackageDescription="3-Pin Plastic (Green) Transistor Single Outline Package, 10 x 9.25 mm Body, 2.54 mm Pitch", PackageReference=PG-TO263-3-2, PackageVersion=Jul-09, Packing=Reel, PartNumber="IPB020NE7N3 G", Polarity=N, Ptot (max)="300 W", QG="155 nC", RDS (on) (max)="2 mOhm", Rth="0.5 K/W", RthJA (max)="62 K/W", RthJC (max)="0.5 K/W", Supplier 1=Mouser, Supplier 2=Digi-Key, Supplier 3=Digi-Key, Supplier 4=Digi-Key, Supplier Part Number 2="IPB020NE7N3 GTR-ND", Supplier Part Number 3="IPB020NE7N3 GCT-ND", Supplier Part Number 4="IPB020NE7N3 GDKR-ND", VDS (max)="75 V", VGS(th) (max)="3.8 V", VGS(th) (min)="2.3 V"
R1 R2 R3 R4 R5 R6 R13 R14 R15 R16 R17 R19 R20 R21 R22 R23 R24 R26 R31 R32 R33 R34 R35 R37: library part ERA3Y, "Rectangular Thick Film Chip Resistor, 10 Ohm to 330k Ohm Range, 0.1% and 0.5% Tolerance, 0603 Size, 0.063 W", PackageDocument=Mar-2003, Code_IPC="1608 [0603]", ComponentLink1Description="Manufacturer Link", ComponentLink1URL=http://www.panasonic.com/industrial/components/resistive_products.htm, ComponentLink2Description=Datasheet, ComponentLink2URL=http://www.panasonic.com/industrial/components/pdf/AOA0000CE8.pdf, LatestRevisionDate=19-Mar-2004, LatestRevisionNote="Silkscreen size reduced.", Note="If flow soldering, adjust pad width of PCB Footprint to 0.7 - 0.8 times the width of the resistor.", PackageReference=ERA-0603, Published=17-Dec-2003, Publisher="Altium Limited"
R7 R8 R9 R10 R11 R12 R36: library part ERA6Y, "Rectangular Thick Film Chip Resistor, 10 Ohm to 1M Ohm Range, 0.1% and 0.5% Tolerance, 0805 Size, 0.1 W", PackageDocument=Mar-2003, Code_IPC="2012 [0805]", ComponentLink1Description="Manufacturer Link", ComponentLink1URL=http://www.panasonic.com/industrial/components/resistive_products.htm, ComponentLink2Description=Datasheet, ComponentLink2URL=http://www.panasonic.com/industrial/components/pdf/AOA0000CE8.pdf, LatestRevisionDate=19-Mar-2004, LatestRevisionNote="Silkscreen size reduced.", Note="If flow soldering, adjust pad width of PCB Footprint to 0.7 - 0.8 times the width of the resistor.", PackageReference=ERA-0805, Published=17-Dec-2003, Publisher="Altium Limited"
R18: library part ERAS, "Metal Film Thermosensitive Chip Resistor, 0.56 Ohm to 10k Ohm Range, 5% Tolerance, 0805 Size, 0.1 W", PackageDocument=Mar-2003, Code_IPC="2012 [0805]", ComponentLink1Description="Manufacturer Link", ComponentLink1URL=http://www.panasonic.com/industrial/components/resistive_products.htm, ComponentLink2Description=Datasheet, ComponentLink2URL=http://www.panasonic.com/industrial/components/pdf/AOF0000CE1.pdf, LatestRevisionDate=19-Mar-2004, LatestRevisionNote="Silkscreen size reduced.", Note="If flow soldering, adjust pad width of PCB Footprint to 0.7 - 0.8 times the width of the resistor.", PackageReference=ERA-0805, Published=17-Dec-2003, Publisher="Altium Limited"
R25 R27 R28 R29 R30: library part ERAV, "Metal Film Thermosensitive Chip Resistor, 0.56 Ohm to 10k Ohm Range, 5% Tolerance, 0603 Size, 0.063 W", PackageDocument=Mar-2003, Code_IPC="1608 [0603]", ComponentLink1Description="Manufacturer Link", ComponentLink1URL=http://www.panasonic.com/industrial/components/resistive_products.htm, ComponentLink2Description=Datasheet, ComponentLink2URL=http://www.panasonic.com/industrial/components/pdf/AOF0000CE1.pdf, LatestRevisionDate=19-Mar-2004, LatestRevisionNote="Silkscreen size reduced.", Note="If flow soldering, adjust pad width of PCB Footprint to 0.7 - 0.8 times the width of the resistor.", PackageReference=ERA-0603, Published=17-Dec-2003, Publisher="Altium Limited"
S1 S2 S3: library part TACKTILE_SWITCH
S4: "DIP Switch, 6 Position, SPST", LatestRevisionDate=17-Jul-2002, LatestRevisionNote="Re-released for DXP Platform.", PackageDescription="DIP Switch; 12 Leads", PackageReference=DIP-12/SW, Published=24-Mar-1999, Publisher="Altium Limited"
U1: "Low Power Low Offset Voltage Dual Comparator, 8-pin Narrow SOIC", Manufacturer="National Semiconductor", PackageTopMarking=NSZXTT*LM*393M, PowerWise=N, Code_IPC=SOIC127P600-8, Code_JEDEC=MS-012-AA, ComponentLink1Description="Manufacturer URL", ComponentLink1URL=http://www.national.com/, ComponentLink2Description="LM393 Datasheet", ComponentLink2URL=http://www.national.com/ds/LM/LM393.pdf, ComponentLink3Description="LM393 Web Page", ComponentLink3URL=http://www.national.com/pf/LM/LM393.html, ComponentLink4Description="M08A Package Page", ComponentLink4URL=http://www.national.com/packaging/folders/m08a.html, CompType=Comparator, DatasheetVersion=Aug-2002, High-Reliability=Y, PackageDescription="SOIC Narrow, 4.9 x 3.9 x 1.45mm, 8 Lead, 1.27mm Pitch", PackageReference=M08A, PackageVersion="revM, May-2009", PartNumber=LM393MX, PinCount=8, RoHS=N
U2 U3 U4: "4-Pin Phototransistor Optocoupler", DatasheetVersion=Nov-2003, LatestRevisionDate=04-Mar-2005, LatestRevisionNote="Sch pins 3 & 4 Swapped.", PackageReference=DIP-4, Published=24-Mar-1999, Publisher="Altium Limited"
U5 U18: "800mA and 1A Low Dropout Positive Regulator 2.85V, 3.3V, 5V, and Adjustable", ComponentLink1Description="Manufacturer Link", ComponentLink1URL=http://www.ti.com/, ComponentLink2Description=Datasheet, ComponentLink2URL=http://www-s.ti.com/sc/ds/REG1117.pdf, DatasheetVersion=Sep-1997, LatestRevisionDate=17-Jul-2002, LatestRevisionNote="Re-released for DXP Platform.", PackageDescription="SOT-223/SC-73; 4 Leads; Body 6.7 x 7.3 mm, inc. leads (LxW max)", PackageReference=ZZ311, PackageVersion=revC, Published=8-Jun-2000, Publisher="Altium Limited"
U6: "1W isolated dc dc converter"
U7: "1.5A Single-Channel / High-Speed Power MOSFETDriver"
U8: "ARM Cortex-M0 32-bit MCU, 16 KB Flash, 4 KB Internal RAM, 15 I/Os, 20-pin TSSOP, -40 to 85 degC, Tube", I/Os (High Current)=15, Operating Frequency(F) (Processor speed) (MHz)=48, Supplier Part Number 1=497-14044-5-ND, Supply Voltage(Vcc) min (V)=2.4, ComponentLink1Description="Manufacturer URL", ComponentLink1URL=http://www.st.com/web/en/home.html, ComponentLink2Description=Datasheet, ComponentLink2URL=http://www.st.com/st-web-ui/static/active/en/resource/technical/document/datasheet/DM00088500.pdf, ComponentLink3Description="Package Specification", ComponentLink3URL=http://www.st.com/st-web-ui/static/active/en/resource/technical/document/datasheet/DM00065136.pdf, Core="ARM Cortex-M0", DatasheetVersion="Rev. 1", FLASH Size (Prog) (kB)=16, Internal RAM Size (kB)=4, Mounting Technology="Surface Mount", PackageDescription="20-Pin Thin Shrink Small Outline Package, 6.5 x 4.4 mm Body, 0.65 mm Pitch", PackageReference=TSSOP20, PackageVersion="Rev. 1, 11/2012", Packing=Tube, PartNumber=STM32F030F4P6, Supplier 1=Digi-Key, Supplier 2=Newark, Supplier 3=Mouser, Supplier Part Number 2=06X3648, Supplier Part Number 3=511-STM32F030F4P6
U9 U15: "Voltage Supervisor with Active-Low, Open Drain Reset, 1 Supply Monitored, -40 to 125 degC, 3-pin SOT-23 (DBZ), Green (RoHS & no Sb/Br)", Manufacturer="Texas Instruments", Rating=Catalog, Supplier Part Number 1=296-29194-2-ND, Threshold Voltage 1 (typ)(Typ)(V)=4.38, # of supplies monitored=1, Code_JEDEC=TO-236-AB, ComponentLink1Description=Datasheet, ComponentLink1URL=http://www.ti.com/general/docs/lit/getliterature.tsp?genericPartNumber=TLV803M&fileType=pdf, DatasheetVersion=SBVS157B, Iq(Typ)(uA)=9, Mounting Technology="Surface Mount", Output Driver Type / Reset Output="Active-low, Open-drain", PackageDescription="3-Pin Plastic Small-Outline Package, 0.95 mm Pitch, 2.4 mm Lead Span", PackageReference=DBZ3, PackageVersion="revB, Apr-2005", PartNumber=TLV803MDBZR, Reset Threshold Accuracy(%)=2, SubFamily="Supervisor and Reset IC", Supplier 1=Digi-Key, Supplier 2=Digi-Key, Supplier 3=Digi-Key, Supplier 4=Newark, Supplier 5=Mouser, Supplier Part Number 2=296-29194-1-ND, Supplier Part Number 3=296-29194-6-ND, Supplier Part Number 4=58T0286, Supplier Part Number 5=595-TLV803MDBZR, Time Delay(ms)=200, VCC(Max)(V)=6, VCC(Min)(V)=1.1
U10: library part ACS71240
U11: "Positive Voltage Regulator, 5V, 4-Pin SOT-89, Tape and Reel", ComponentLink1Description="Manufacturer URL", ComponentLink1URL=http://www.st.com, ComponentLink2Description=Datasheet, ComponentLink2URL=http://www.st.com/internet/com/TECHNICAL_RESOURCES/TECHNICAL_LITERATURE/DATASHEET/CD00000446.pdf, DatasheetVersion=Feb-2011, PackageDescription="3-Pin SOT-89 Package 1.5 mm Pitch, 4.1 mm Lead Span", PackageReference=SOT-89, PackageVersion=2011, PartNumber=L78L05ACUTR
U12: "ARM Cortex-M0 32-bit MCU, 64 KB Flash, 8 KB Internal RAM, 39 I/Os, 48-pin LQFP, -40 to 85 degC, Tray", I/Os (High Current)=39, Operating Frequency(F) (Processor speed) (MHz)=48, Supplier Part Number 1=497-14043-ND, Supply Voltage(Vcc) min (V)=2.4, ComponentLink1Description="Manufacturer URL", ComponentLink1URL=http://www.st.com/web/en/home.html, ComponentLink2Description=Datasheet, ComponentLink2URL=http://www.st.com/st-web-ui/static/active/en/resource/technical/document/datasheet/DM00088500.pdf, ComponentLink3Description="Package Specification", ComponentLink3URL=http://www.st.com/st-web-ui/static/active/en/resource/technical/document/datasheet/DM00058181.pdf, Core="ARM Cortex-M0", DatasheetVersion="Rev. 1", FLASH Size (Prog) (kB)=64, Internal RAM Size (kB)=8, Mounting Technology="Surface Mount", PackageDescription="48-Pin Low Profile Quad Flat Package, 7 x 7 mm Body, 0.5 mm Pitch", PackageReference=LQFP48, PackageVersion="Rev. 6, 06/2013", Packing=Tray, PartNumber=STM32F030C8T6, Supplier 1=Digi-Key, Supplier 2=Newark, Supplier 3=Mouser, Supplier Part Number 2=06X3647, Supplier Part Number 3=511-STM32F030C8T6
U13: "Differential Bus Transceiver", Code_IPC=SOIC127P600-8, ComponentLink1Description="Manufacturer Link", ComponentLink1URL=http://www.ti.com/, ComponentLink2Description=Datasheet, ComponentLink2URL=http://www-s.ti.com/sc/ds/sn75176b.pdf, DatasheetVersion=Sep-1989, LatestRevisionDate=13-Apr-2006, LatestRevisionNote="IPC-7351 Footprint Added.", Note="Receiver Hysteresis of 50mV Typical", PackageDescription="8-Pin Small Outline Integrated Circuit 1.27 mm Pitch", PackageReference=D008, PackageVersion=Jan-1998, Published=15-May-2002, Publisher="Altium Limited"
U14: library part TPD2E007DCKR, "ESD Protection Array for AC Signal Data Interface, 2 Channels, -40 to +85 degC, 3-pin SC70 (DCK), Green (RoHS & no Sb/Br)", Breakdown Voltage(Min)(V)=+/-14, IO Capacitance(Typ)(pF)=15, IO Leakage Current(nA)=50, Manufacturer="Texas Instruments", Supplier Part Number 1=296-25281-2-ND, ComponentLink1Description=Datasheet, ComponentLink1URL=http://www.ti.com/general/docs/lit/getliterature.tsp?genericPartNumber=TPD2E007&fileType=pdf, ComponentLink2Description="URL Link1", ComponentLink2URL=SamplesURL:http://www.ti.com/product/tpd2e007#samples, DatasheetVersion=SLVS796E, Eco-Plan="Green (RoHS & no Sb/Br)", IEC 61000-4-2 Air-Gap(+/- kV)=15, IEC 61000-4-2 Contact(+/- kV)=8, Mounting Technology="Surface Mount", PackageDescription="3-Pin Plastic Small-Outline Package, 0.65 mm Pitch, 2.1 mm Lead Span", PackageReference=DCK3, PackageVersion="revG, Jan-2007", PartNumber=TPD2E007DCKR, SubFamily="ESD Solution", Supplier 1=Digi-Key, Supplier 2=Digi-Key, Supplier 3=Digi-Key, Supplier 4=Farnell, Supplier 5=Newark, Supplier 6=Newark, Supplier 7=Mouser, Supplier Part Number 2=296-25281-1-ND, Supplier Part Number 3=296-25281-6-ND, Supplier Part Number 4=2120465, Supplier Part Number 5=94T5089, Supplier Part Number 6=55R7554, Supplier Part Number 7=595-TPD2E007DCKR
U16: "1Kbit, 400kHz, 1.8V, I2C Serial EEPROM, 5-Pin SOT-23, Industrial Temperature, Tape and Reel", Supplier Part Number 1=24AA01T-I/OTTR-ND, Code_IPC=SOT23-5, ComponentLink1Description=Datasheet, ComponentLink1URL=http://ww1.microchip.com/downloads/en/DeviceDoc/21711J.pdf, ComponentLink2Description="Packaging Specification", ComponentLink2URL=http://www.microchip.com/stellent/groups/techpub_sg/documents/packagingspec/en012702.pdf, ComponentLink3Description="Microchip.com Home", ComponentLink3URL=http://www.microchip.com/, DatasheetVersion="revJ, Jan-2009", PackageDescription="5-Lead Plastic Small Outline Transistor (OT) [SOT-23]", PackageReference=SOT-23-OT5, PackageVersion="revBB, Aug-2009", Published=29-Jan-2009, Publisher="Altium Limited", Supplier 1=Digi-Key, Supplier 2=Digi-Key, Supplier 3=Digi-Key, Supplier 4=Farnell, Supplier Part Number 2=24AA01T-I/OTCT-ND, Supplier Part Number 3=24AA01T-I/OTDKR-ND, Supplier Part Number 4=1331269
U17: library part AP63200, "2A synchronous  buck converter"

## Via types
v1: diameter 30, hole 10, Top Layer to Bottom Layer, 54 vias
v2: diameter 50, hole 28, Top Layer to Bottom Layer, 26 vias

## Nets (pads, with @x,y where several pads share a name; then routed paths per layer and width w, separated by ;. In a path a pad name is that pad's centre, name@x,y a point inside that pad or via, vN(x,y) a via of type N, cw(c..) or ccw(c..) an arc to the next point about the centre after c; other vN are vias at no path point)
3V3: C23.2 C24.1 C25.1 C26.1 C35.2 C36.1 R33.2 R34.2 R35.2 R36.2 U12.1 U12.24 U12.48 U15.3 U16.4 U18.2 U18.4 | length 3210.4
  Top Layer w30: v1(4140,1450) 4140,1340 4157.13,1322.87 U18.4@4320,1322.87 U18.4@4323.66,1326.54 ; U18.2@4320,1057.13 4320,1170 ; C36.1@4327.1,1473.9 4327.1,1329.97 U18.4@4323.66,1326.54 ; C35.2@4490,1326.54 U18.4@4323.66,1326.54
  Bottom Layer w10: C26.1@3773.46,2000 3818.82,2000 3840.1,1978.72 3840.1,1969.1 3840.94,1968.27 U12.24@3850.55,1968.27 ; U12.1@4118.27,1700.55 4118.82,1700 4138.9,1700 ; 4138.9,1702.83 4143.9,1702.83 ; U15.3@4144.8,1542.6 4154.35,1542.6 4161.16,1535.79 4161.16,1526.24 4180.87,1506.54 R33.2@4200,1506.54 ; 4167.4,1717.4 4169.45,1719.45 U12.48@4169.45,1751.73
  Bottom Layer w20: 4143.9,1702.83 4152.83,1702.83 4167.4,1717.4 4207.4,1717.4 4230,1740 4277.4,1740 4283.94,1733.46 C25.1@4350,1733.46 ; C25.1@4350,1725.43 4359.69,1735.12 4375.12,1735.12 4380,1740 C23.2@4416.54,1740 4407.4,1749.13 U16.4@4407.4,1802.76 4456.22,1802.76 4458.35,1804.88 4460.31,1804.88 4470,1814.57 R35.2@4470,1816.54 R34.2@4530,1816.54
  Bottom Layer w30: C26.1@3773.46,2000 3773.46,2056.54 3760,2070 3660,2070 3630,2040 3630,1490 3670,1450 3880,1450 ; R36.2@3860,1496.54 3863.73,1492.8 3863.73,1466.27 3880,1450 ; 4167.4,1717.4 4167.4,1682.6 4240,1610 4260,1610 4270,1600 4270,1520 4246.54,1496.54 R33.2@4210,1496.54 ; R33.2@4203.35,1499.88 4153.46,1450 v1(4140,1450) 3880,1450
5V: C22.1 C32.2 C33.1 C34.2 L1.1 U13.8 U17.1 U18.3 | length 2651.5
  Top Layer w10: U13.8@4343.71,2710 4350,2703.71 U13.8@4350,2700
  Top Layer w20: C22.1@4273.46,2710 U13.8@4343.71,2710 ; U13.8@4350,2703.71 v1(4350,2770) ; U18.3@4410.55,1057.13 4410.55,1065.98 4422.2,1077.64 4431.06,1077.64 4460.83,1107.4 U17.1@4600,1107.4 ; C33.1@4617.1,1473.9 4623.2,1480 v1(4720,1480)
  Top Layer w30: L1.1@4582.4,1237.68 4582.4,1325.87 4609.88,1353.35 4609.88,1355.31 4614.57,1360 C34.2@4616.54,1360 4617.1,1360.56 C33.1@4617.1,1473.9
  Bottom Layer w20: v1(4350,2770) 4350,2820 4380,2850 4780,2850 4810,2820 4810,1540 4750,1480 v1(4720,1480)
12V: C30.1 C31.2 P13.7 P13.8 P14.7 P14.8 P15.7 P15.8 P16.7 P16.8 P21.2 U17.2 U17.3 | length 3166.9
  Top Layer w20: U17.3@4600,1032.6 U17.2@4600,1070
  Top Layer w30: 4248.58,470 C31.2@4466.54,470 ; 4540,930 4600,990 U17.3@4600,1032.6
  Top Layer w50: C30.1@4248.58,775.76 4248.58,470 4248.58,396.49 P21.2@4405.07,240
  Top Layer w60: P16.7@4050,965 4125,965 4248.58,841.42 ; C30.1@4248.58,775.76 4248.58,841.42 ; 4540,930 4337.16,930 4248.58,841.42
  Bottom Layer w60: P13.8@2510,965 P13.7@2610,965 P14.8@2990,965 P14.7@3090,965 P15.8@3470,965 P15.7@3570,965 P16.8@3950,965 P16.7@4050,965
+3V3_1: C3.2 C4.2 C5.2 C15.2 C16.2 C17.2 R2.2 R16.2 R19.2 R20.2 U3.4 U5.2 U5.4 U8.5 U8.16 U9.3 | length 3660.9
  Top Layer w10: 650,255 652.2,252.8 U8.5@717.8,252.8 ; v1(878.99,252.63) 879.16,252.8 U8.16@942.2,252.8 1021.05,252.8 1032.13,263.88 1032.13,301.9 1034.78,304.56 1061.96,304.56 C15.2@1080,322.6 ; 1028.06,262.32 1028.06,300.35
  Top Layer w20: v1(605,615) 605,730 835,960 v1(970,960)
  Top Layer w30: v1(474.22,89.22) 515,130 v1(515,165) ; v1(515,255) 650,255 ; C15.2@1080,322.6 C16.2@1148.94,322.6 ; v1(1080,960) 1125,915 1125,725 1135,715 R20.2@1176.54,715 1178.37,713.16 1178.37,686.63 1245,620 1340,620 U3.4@1345,615
  Bottom Layer w20: R2.2@603.46,560 605,561.54 v1(605,615) ; 878.99,123.99 v1(878.99,252.63)
  Bottom Layer w30: v1(474.22,89.22) 498.43,65 850,65 880,95 880,251.62 v1(878.99,252.63) ; v1(515,165) v1(515,255) 589.03,255 599.72,265.69 602.22,263.19 621.26,263.19 631.54,273.46 ; R2.2@603.46,560 R16.2@603.46,450 603.46,346.54 610.47,339.53 U9.3@610.47,328.19 ; U9.3@625,325 625,280 631.54,273.46 ; C17.2@631.54,175 R19.2@631.54,240 631.54,273.46 ; U5.2@892.13,1100 1010,1100 1015,1095 ; 1245,955 1245,945 1290,900 1290,645 1315.29,619.71 1340.29,619.71 U3.4@1345,615
+12_1: C2.1 C6.2 C9.2 U5.3 U6.6 U7.2 U11.3 | length 2389.4
  Top Layer w10: v1(696.66,898.4) 788.26,990 1010,990 1050,1030 U7.2@1250,1030 1285,1030 1295,1020 1295,970 1320.31,944.69 1326.85,944.69 C9.2@1341.54,930 ; v1(725,720) 725,690 925,490 960,490 1018.51,431.49 1113.05,431.49 1114.54,430 1175,430 1224.8,380.2 U11.3@1224.8,234.06
  Bottom Layer w10: v1@719.59,720 v1(725,720)
  Bottom Layer w20: C2.1@698.03,1005 698.03,741.56 v1@719.59,720
  Bottom Layer w30: C6.2@588.46,1130 655,1130 ; U6.6@655,1195 655,1130 ; C2.1@698.03,1005 698.03,1111.97 ; U5.3@892.13,1190.55 776.61,1190.55 698.03,1111.97 ; 655,1130 680,1130 698.03,1111.97
+12V: C7.2 C8.2 P2.7 P2.8 R1.1 R15.1 U6.1 | length 1611.4
  Top Layer w30: R15.1@80,371.54 80,320 115,285 325,285 362.79,247.21 362.79,245.07 375,232.86 375,225 P2.7@375,125 ; R15.1@85.31,371.54 85.31,377.77 54.81,377.77 45,387.58 45,635 ; R1.1@90,638.46 48.46,638.46 45,635 ; U6.1@155,1195 45,1085 45,635
  Bottom Layer w30: U6.1@155,1195 155,1126.54 164.88,1116.65 164.88,1114.69 169.57,1110 C7.2@171.54,1110 171.54,1038.94 C8.2@167.6,1035
ADDRESS_0: P20.6 U12.45 | length 931.9
  Top Layer w10: v1(4050,1810) 4050,1970 4120,2040 4560,2040 P20.6@4640,2120
  Bottom Layer w10: v1(4050,1810) 4137.85,1810 4138.29,1810.44 4169.1,1810.44 U12.45@4169.45,1810.79
ADDRESS_1: P20.8 U12.46 | length 1075.9
  Top Layer w10: v1(4010,1810) 4010,1960 4110,2060 4480,2060 P20.8@4640,2220
  Bottom Layer w10: v1(4010,1810) 4010,1790 4020,1780 4080,1780 4091.1,1791.1 U12.46@4169.45,1791.1
ADDRESS_2: P20.10 U12.21 | length 988.9
  Top Layer w10: v1(3970,1950) 3970,2000 4180,2210 4530,2210 P20.10@4640,2320
  Bottom Layer w10: U12.21@3850.55,1909.21 3929.21,1909.21 v1(3970,1950)
ADDRESS_3: P20.12 U12.22 | length 1063.2
  Top Layer w10: v1(3928.79,1951.21) 3928.79,1988.79 4168.79,2228.79 4478.79,2228.79 4520,2270 4520,2350 4590,2420 P20.12@4640,2420
  Bottom Layer w10: U12.22@3850.55,1928.9 3908.9,1928.9 3928.79,1948.79 v1(3928.79,1951.21)
ADDRESS_4: P20.14 U12.25 | length 1259.1
  Bottom Layer w10: U12.25@3901.73,2019.45 3901.73,2101.73 4310,2510 4440,2510 4600,2670 4660,2670 4690,2640 4690,2570 P20.14@4640,2520
ADDRESS_5: P20.16 U12.26 | length 1009.5
  Bottom Layer w10: U12.26@3921.42,2019.45 3921.42,2091.42 4320,2490 4450,2490 4580,2620 P20.16@4640,2620
BUTTON_DOWN: P20.4 U12.20 | length 843.5
  Top Layer w10: v1(4080,1950) 4150,2020 P20.4@4640,2020
  Bottom Layer w10: U12.20@3850.55,1889.53 4019.53,1889.53 v1(4080,1950)
BUTTON_OK: P20.2 U12.19 | length 876.5
  Top Layer w10: v1(4080,1900) 4180,2000 4560,2000 P20.2@4640,1920
  Bottom Layer w10: U12.19@3850.55,1869.84 4049.84,1869.84 v1(4080,1900)